# Altium PCB 5V Supply and Protection.PcbDoc
Units mil, origin at the board's own origin, x right, y up, seen from the top; angles counter-clockwise.
Board outline 6000 x 4000 mil, 2 copper layers (Top Layer, Bottom Layer); 5 components, 5 nets, 11 pads, 0 vias.
Unrouted connection lines stored in the file: 1.
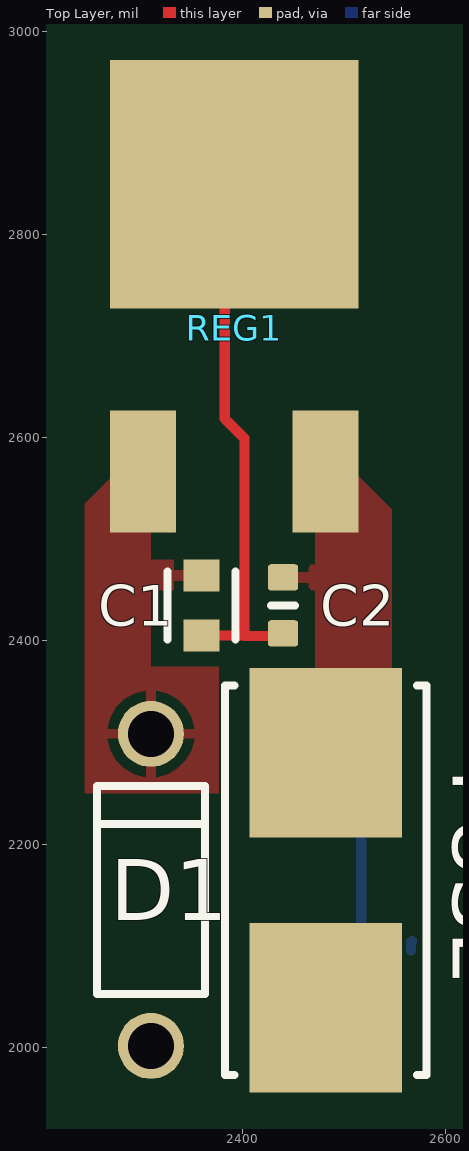
[diagram p0: Top Layer view]
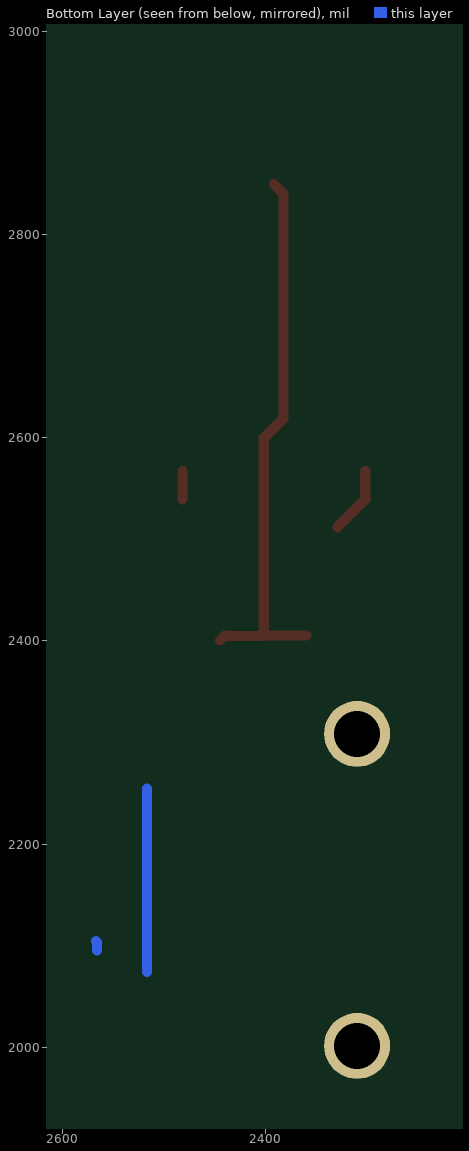
[diagram p1: Bottom Layer view, seen from below]
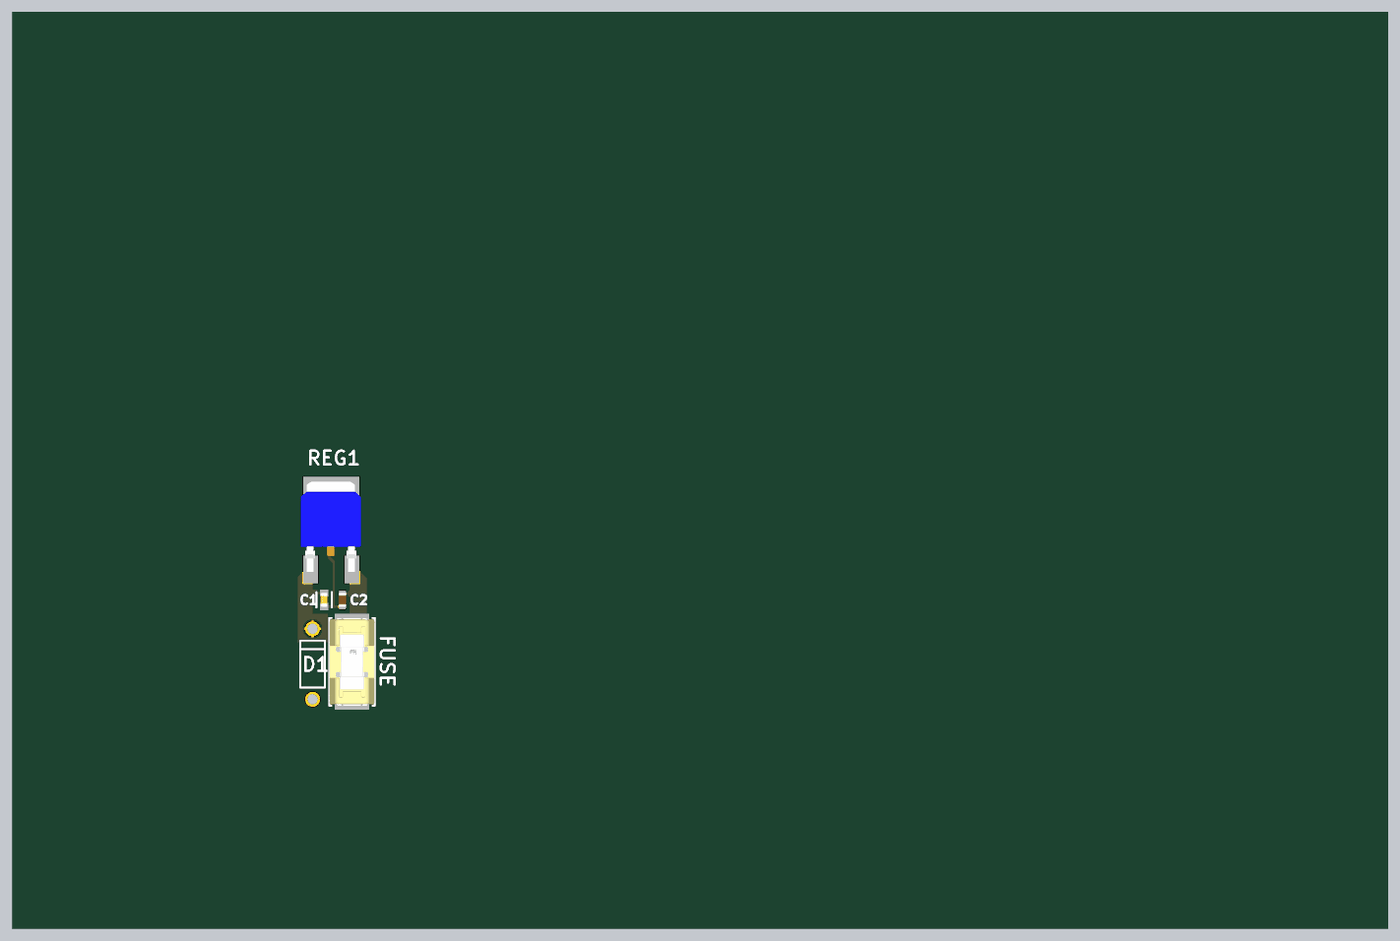
[diagram p2: 3D render of the assembled board from above, using the file's embedded part models]

## Layer stack, top to bottom
Top Solder: solder mask 0.4, Solder Resist, Dk 3.5
Top Layer: signal copper 1.4
Dielectric 1: dielectric 12.6, FR-4, Dk 4.8
Bottom Layer: signal copper 1.4
Bottom Solder: solder mask 0.4, Solder Resist, Dk 3.5

## Board outline
1000,1000 7000,1000 7000,5000 1000,5000

## Design rules (kind name [scope] priority, off if disabled: settings)
Clearance [All] p1: gap=10 ignorepadtopadclearanceinfootprint=FALSE except(0: Arc-Hole Track-Hole SMDPad-Hole THPad-Hole Via-Hole Fill-Hole Poly-Hole Region-Hole Text-Hole)
PolygonConnect [All] p1: connectstyle=Relief reliefconductorwidth=10 reliefentries=4 polygonreliefangle="90 Angle" airgapwidth=10
RoutingVias [All] p1: holewidth=28 width=50 viastyle="Through Hole" minholewidth=28 minwidth=50 maxholewidth=28 maxwidth=50
SolderMaskExpansion [All] p1: expansion=4 istentingtop=FALSE
Width [All] p1: maxlimit=10 minlimit=10 preferedwidth=10
30 further rules are at their usual default settings.

## Components (designator, comment, footprint, x,y, rotation, side; value= is the part's Value field where it differs from the comment)
C1 "CC0603KRX7R7BB334" FP-CC0603-DA-MFG 2360,2435 r270 top value="330 nF"
C2 "Capacitor 10µF +/-20% 10V 0603" CAPC0603(1608)100_L 2440,2435 r270 top value=10µF
D1 "1N4004" FAIR-DO-41-2 2310,2155 r90 top
FUSE "0154.250DR" FP-0154-MFG 2481.97,2164.53 r270 top
REG1 "MC78M05BDTG" DPAK3 2269.47,2972.03 r270 top

## Footprints (in the part's own frame and the unit in brackets; to place one, negate y for a bottom-side part, rotate by r counter-clockwise, add the part's x,y. Pads: shape width x height; smd on the part's side, far side on the other; paste and mask are expansions set on the pad)
CAPC0603(1608)100_L [mm] "Chip Capacitor, Body 1.6x0.8mm, Height 1.0mm, IPC High Density"
  rrect25% 0.66x0.76 smd: 1(-0.7,0) 2(0.7,0)
  silkscreen extent 0,-0.3 0,0.3, body extent -0.8,-0.4 0.8,0.4, height 0.95
DPAK3 [mil]
  rect 120x65 smd: 1(405,32.5) 3(405,212.5)
  rect 245x245 smd: 2(122.5,122.5)
  body extent 22,-10 416,250, height 93
FAIR-DO-41-2 [mm] "THD, 2-Leads, Body 5.2x2.72mm, Pin Spacing 7.8mm"
  round 1.65 hole 1.15: 1(-3.9,0) 2(3.9,0)
  silkscreen extent -2.6,-1.35 2.6,1.35, body extent -4.29,-1.17 4.29,1.17, height 2.35
FP-0154-MFG [mil]
  rect 167x150 smd paste+0 mask+0: 1(-125.5,0) 2(125.5,0)
  silkscreen extent -192,-99 192,99, body extent -213,-103 213,103, height 10
FP-CC0603-DA-MFG [mm]
  rect 0.8x0.9 smd paste+0 mask+0: 1(-0.75,0) 2(0.75,0)
  silkscreen extent -0.85,-0.85 0.85,0.85, body extent -1.35,-0.75 1.35,0.75, height 0.25

## Part data
C1: library part CMP-03422-000838-1, "CAP CER 0.33UF 16V X7R 0603", Capacitance="330 nF", Manufacturer=YAGEO, Package=CC0603-DA, Temperature="-55°C to +125°C", Temperature Characteristic=X7R, Temperature Coefficient=15%, Temperature Range High=+125°C, Temperature Range Low=-55°C, Tolerance=0.1, Voltage="16 V", Automotive=No, Category=Cap, ComponentLink2Description=Datasheet, ComponentLink2URL=http://www.yageo.com/documents/recent/UPY-GPHC_X7R_6.3V-to-50V_18.pdf, Device Class L1="Passive Components", Device Class L2=Capacitors, Device Class L3="Ceramic Capacitors", Digikey Description="CAP CER 0.33UF 16V X7R 0603", Footprint Url=http://www.yageo.com/exep/pages/download/literatures/UPY-C_GEN_24.pdf, Height=0.9mm, Lead Free=Yes, Manufacturer Part Number=CC0603KRX7R7BB334, Material=Ceramic, Mouser Description="Multilayer Ceramic Capacitors MLCC - SMD/SMT 330nF 16V X7R 10%", Octopart=https://octopart.com/cc0603krx7r7bb334-yageo-9291796, RoHS=TRUE, Voltage Rating="16 V"
C2: library part CMP-001-00075-2, "Chip Capacitor, 10µF +/-20%, 10V, 0603, Thickness 1 mm", Case/Package=0402, Max Operating Temperature=85°C, Min Operating Temperature=-55°C, Tolerance=10%, Voltage Rating=10V, Mounting Technology=SMT, Pins=2
D1: library part CMP-004-00004-1, "General Purpose Rectifier, 400 V, 1 A, -55 to 175 degC, 2-Pin DO-204AL (DO-41), RoHS, Tape and Reel", Case/Package=DO-41-2, Forward Current=1A, Forward Voltage=1.1V, Manufacturer="Fairchild Semiconductor", Max Operating Temperature=175°C, Max Surge Current=30A, Min Operating Temperature=-55°C, Package Description="2-Pin Axial Lead, Dia 2.375 mm, Body Length 4.63 mm", Package Quantity=5000, Package Version="Rev. 2, 09/2008", Peak Reverse Current=50A, Datasheet URL=https://www.fairchildsemi.com/datasheets/1N/1N4004.pdf, Datasheet Version="Rev. 1.1.0, 11/2014", Diameter=2.72mm, Manufacturer URL=https://www.fairchildsemi.com/, Mounting Technology=TH, Package Reference=DO-41-2, Package URL=http://www.fairchildsemi.com/dwg/DO/DO41A.pdf, Packaging=TapeandReel, Pins=2, RoHS Compliant=True
FUSE: library part CMP-08605-000036-1, "FUSE BOARD MNT 250MA 125VAC/VDC", Fuse Current=0.25A, Manufacturer=Littelfuse, Max Fuse Ac Voltage=125V, Package=0154, Temperature="-55°C to +125°C", Temperature Range High=+125°C, Temperature Range Low=-55°C, Automotive=No, Category=Fuse, ComponentLink2Description=Datasheet, ComponentLink2URL=https://www.littelfuse.com/~/media/electronics/datasheets/fuses/littelfuse_fuse_154_154t_154l_154tl_datasheet.pdf.pdf, Device Class L1="Circuit Protection", Device Class L2=Fuses, Device Class L3=unset, Digikey Description="FUSE BOARD MNT 250MA 125VAC/VDC", Fuse Blow Speed=Fast, Fuse I2T=0.0113A2Sec, Height=3.81mm, Lead Free=Yes, Manufacturer Part Number=0154.250DR, Max Fuse Dc Voltage=125V, Mouser Description="Surface Mount Fuses Fuseblck w/ fuse.25A OMNI BLOK 154", Octopart=https://octopart.com/0154.250dr-littelfuse-565851, RoHS=TRUE, Voltage Rating=125V
REG1: "IC REG LINEAR 5V 0.5A DPAK3", Supplier Part Number 1=8051784, Supplier 1=RSComponents

## Nets (pads, with @x,y where several pads share a name; then routed paths per layer and width w, separated by ;. In a path a pad name is that pad's centre, name@x,y a point inside that pad or via, vN(x,y) a via of type N, cw(c..) or ccw(c..) an arc to the next point about the centre after c; other vN are vias at no path point)
+5: FUSE.2
+12: D1.1
"CAN GND": C1.2 C2.2 REG1.2 | length 543.9
  Top Layer w10: C1.2 2401.5,2405.47 2401.97,2405 ; REG1.2 2382.59,2840.15 2382.59,2618.9 2401.97,2599.53 2401.97,2405 ; C2.2@2445,2400.47 2440,2405.47 2439.53,2405 2401.97,2405
REG_IN: C1.1 D1.2 REG1.1 | length 66.4
  Top Layer w10: REG1.1 2301.97,2539.53 REG1.1@2329.47,2512.03
REG_OUT: C2.1 FUSE.1 REG1.3 | length 27.5
  Top Layer w10: REG1.3@2481.97,2539.53 REG1.3
copper on no net: | length 189.5
  Bottom Layer w10: 2516.97,2074.53 2516.97,2254.53 ; 2566.11,2095.39 2566.11,2103.67 2566.97,2104.53

## Polygon pours and split planes (outlines as drawn)
REG_IN on Top Layer "REG_IN_L01_P002" (solid, pour order 2): 2310,2480 2370,2480 2370,2450 2310,2450 2310,2374.53 2376.97,2374.53 2376.97,2250 2245,2250 2245,2535 2270,2560 2310,2560
REG_OUT on Top Layer "REG_OUT_L01_P003" (solid, pour order 3): 2471.97,2475 2425,2475 2425,2449.83 2471.97,2449.83 2471.97,2209.53 2546.97,2209.53 2546.97,2529.53 2511.97,2564.53 2471.97,2564.53